# Altium PCB PCB1.PcbDoc
Units mil, origin at the board's own origin, x right, y up, seen from the top; angles counter-clockwise.
Board outline 6000 x 4000 mil, 2 copper layers (Top Layer, Bottom Layer); 11 components, 8 nets, 32 pads, 0 vias.
Unrouted connection lines stored in the file: 18.
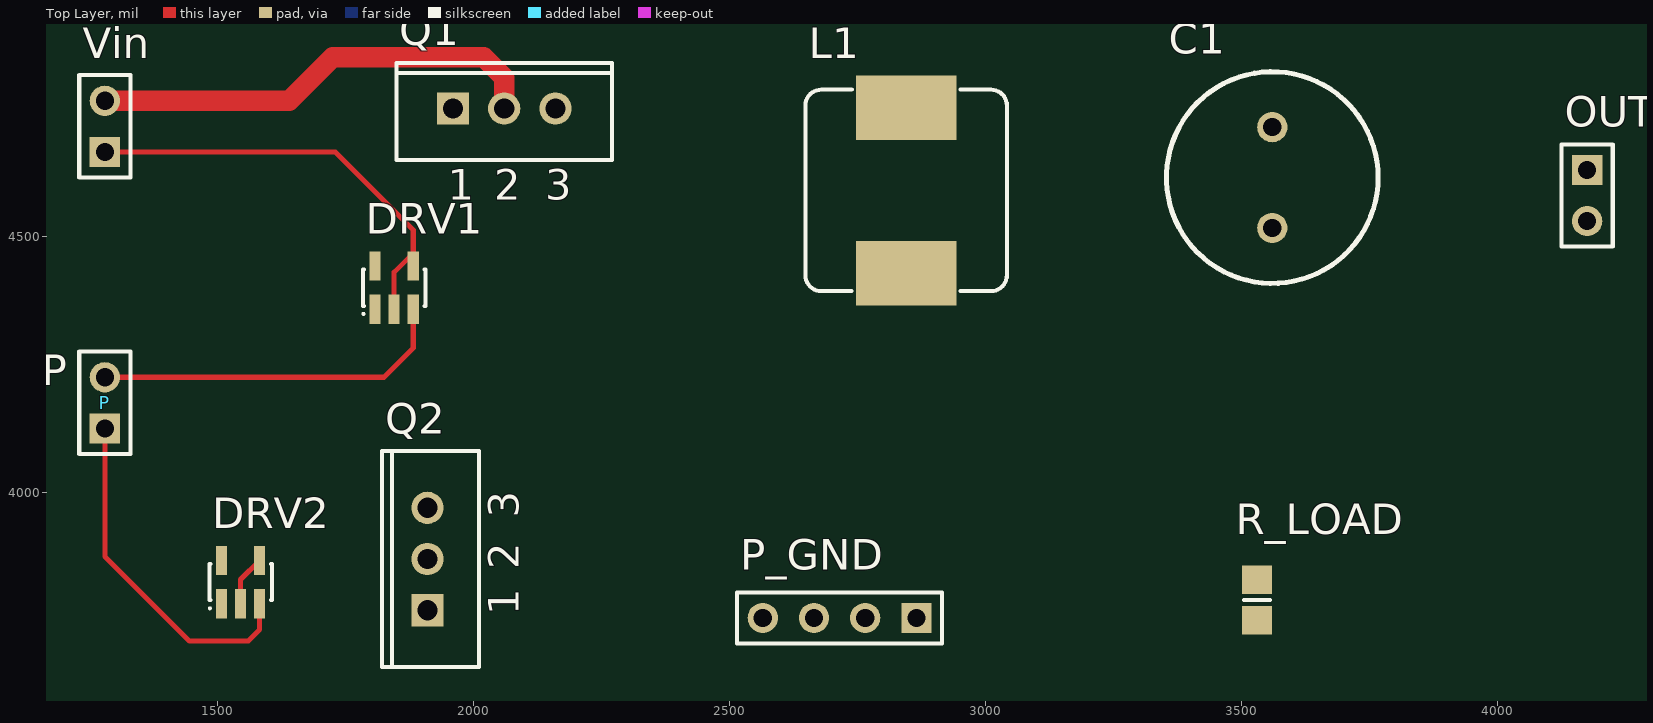
[diagram p0: Top Layer view]
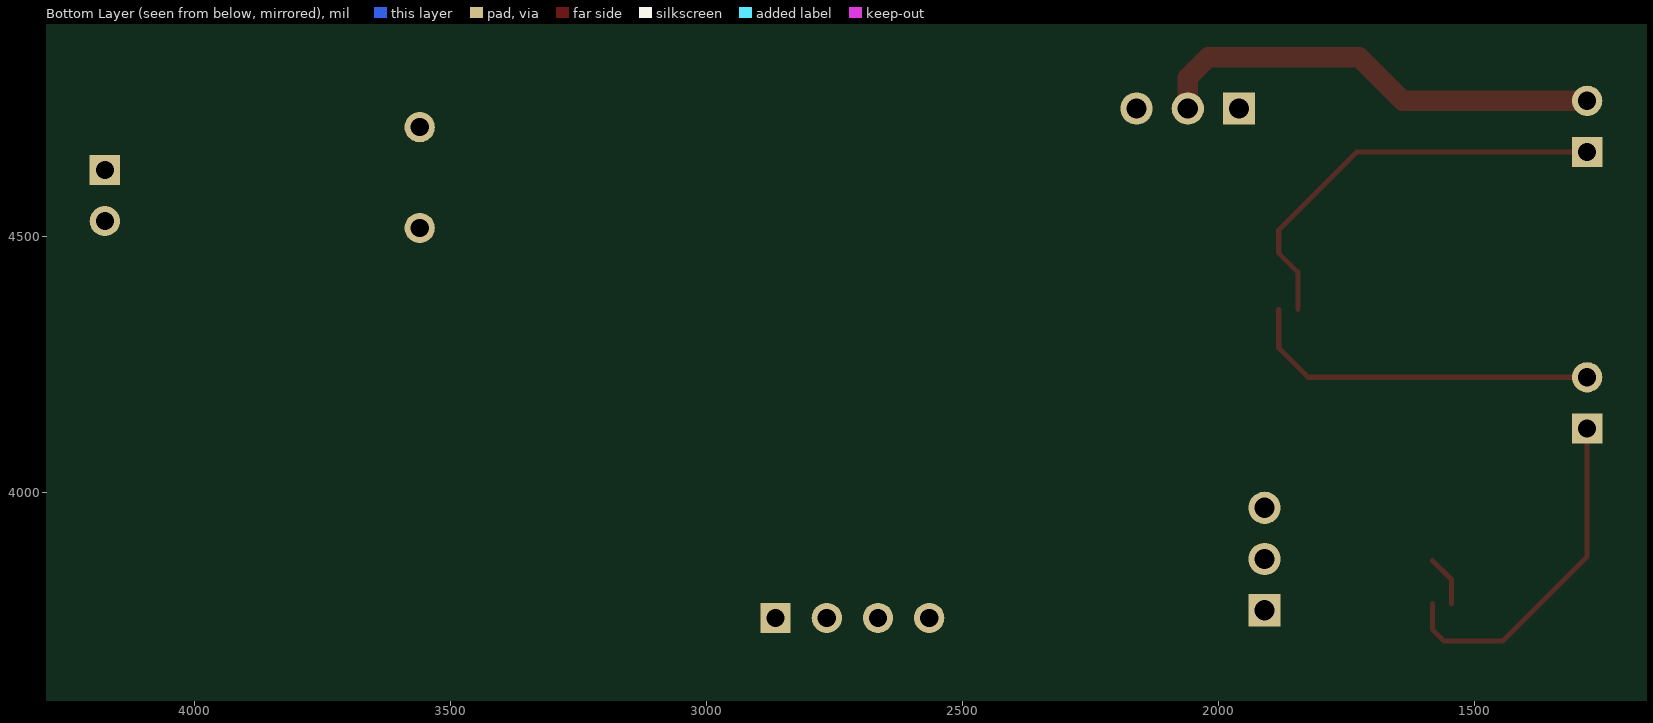
[diagram p1: Bottom Layer view, seen from below]

## Layer stack, top to bottom
Top Solder: solder mask 0.4, Solder Resist, Dk 3.5
Top Layer: signal copper 1.4
Dielectric 1: dielectric 12.6, FR-4, Dk 4.8
Bottom Layer: signal copper 1.4
Bottom Solder: solder mask 0.4, Solder Resist, Dk 3.5

## Board outline
1000,1000 7000,1000 7000,5000 1000,5000

## Design rules (kind name [scope] priority, off if disabled: settings)
Clearance [All] p1: gap=10
PolygonConnect [All] p1: connectstyle=Relief reliefconductorwidth=10 reliefentries=4 polygonreliefangle="90 Angle" airgapwidth=10
RoomDefinition Sheet1 [InComponentClass('Sheet1')] p1: confinementstyle=ConfineIn formatcopy=TRUE lockcomponents=FALSE outline 0,0 2000,0 2000,1000 0,1000
RoutingVias [All] p1: holewidth=28 width=50 viastyle="Through Hole" minholewidth=28 minwidth=50 maxholewidth=28 maxwidth=50
SolderMaskExpansion [All] p1: expansion=4
Width [All] p1: maxlimit=40 minlimit=10 preferedwidth=10
30 further rules are at their usual default settings.

## Components (designator, comment, footprint, x,y, rotation, side; value= is the part's Value field where it differs from the comment)
C1 "Cap" RB5-10.5 3560,4615 r90 top
DRV1 "Gate Driver" SO-G5/P.95 1845,4400 r0 top
DRV2 "Gate Driver" SO-G5/P.95 1545,3825 r0 top
L1 "Inductor" "WE-PD HV_1060" 2845,4590 r0 top
OUT "Header 2" HDR1X2 4175,4630 r270 top
P "Header 2" HDR1X2 1280,4125 r90 top
P_GND "Header 4" HDR1X4 2865,3755 r180 top
Q1 "MOSFET-N" TO-220-AB 2060,4750 r0 top
Q2 "MOSFET-N" TO-220-AB 1910,3870 r90 top
R_LOAD "Res1" 6-0805_M 3530,3790 r90 top
Vin "Header 2" HDR1X2 1280,4665 r90 top

## Footprints (in the part's own frame and the unit in brackets; to place one, negate y for a bottom-side part, rotate by r counter-clockwise, add the part's x,y. Pads: shape width x height; smd on the part's side, far side on the other; paste and mask are expansions set on the pad)
6-0805_M [mm] "Chip Resistor, Body 2.0x1.2mm, IPC Low Density"
  rect 1.4x1.5 smd: 1(-1,0) 2(1,0)
  silkscreen extent 0,-0.65 0,0.65, body extent -1.07,-0.7 1.07,0.7, height 0.7
HDR1X2 [mm] "Connector; Header; 2 Position"
  rect 1.5x1.5 hole 0.9: 1(0,0)
  round 1.5 hole 0.9: 2(2.54,0)
  silkscreen extent -1.27,-1.27 3.81,1.27
HDR1X4 [mm] "Connector; Header; 4 Position"
  rect 1.5x1.5 hole 0.9: 1(0,0)
  round 1.5 hole 0.9: 2(2.54,0) 3(5.08,0) 4(7.62,0)
  silkscreen extent -1.27,-1.27 8.89,1.27
RB5-10.5 [mm] "Capacitor (Radial); 2 Leads"
  round 1.5 hole 0.9: 1(-2.5,0) 2(2.5,0)
  silkscreen extent -5.25,-5.25 5.25,5.25
SO-G5/P.95 [mm] "SOT-23/SC-74A; 5 Leads; Body 3.1 x 3 mm, inc. leads (LxW max)"
  rect 0.55x1.45 smd: 1(-0.95,-1.075) 2(0,-1.075) 3(0.95,-1.075) 4(0.95,1.075) 5(-0.95,1.075)
  silkscreen extent -1.57,-1.35 1.55,0.9
TO-220-AB [mm] "TO, Thru-Hole, Vertical, Heatsink Mounted; 3 In-Line Leads; Pitch 2.54 mm"
  rect 1.6x1.6 hole 1: 1(-2.54,0)
  round 1.6 hole 1: 2(0,0) 3(2.54,0)
  silkscreen extent -5.35,-2.55 5.35,2.25
"WE-PD HV_1060" [mm] "SMD Power Inductor, body 10x10"
  rect 5x3.2 smd: 1(0,4.1) 2(0,-4.1)
  silkscreen extent -5,-5 5,5, body extent -5,-5 5,5, height 5.7

## Part data
C1: "Capacitor"
DRV1 DRV2: library part Component_1
OUT P Vin: "Header, 2-Pin"
P_GND: "Header, 4-Pin"
Q1 Q2: "N-Channel MOSFET"
R_LOAD: "Resistor"

## Nets (pads, with @x,y where several pads share a name; then routed paths per layer and width w, separated by ;. In a path a pad name is that pad's centre, name@x,y a point inside that pad or via, vN(x,y) a via of type N, cw(c..) or ccw(c..) an arc to the next point about the centre after c; other vN are vias at no path point)
GND: C1.1 DRV1.2 DRV1.4 DRV2.2 DRV2.4 OUT.2 P_GND.1 P_GND.2 P_GND.3 P_GND.4 Q2.3 R_LOAD.1 Vin.1 | length 936.1
  Top Layer w10: Vin.1 1730,4665 1882.4,4512.6 1882.4,4467.4 1845,4430 DRV1.2 ; DRV2.2 1545,3829.92 DRV2.4
NetC1_2: C1.2 L1.2 OUT.1 R_LOAD.2
NetDRV1_3: DRV1.3 P.2 | length 701.5
  Top Layer w10: P.2 1825,4225 1882.4,4282.4 DRV1.3
NetDRV1_5: DRV1.5 Q1.1
NetDRV2_3: DRV2.3 P.1 | length 680.3
  Top Layer w10: P.1 1280,3875 1445,3710 1560,3710 1582.4,3732.4 DRV2.3
NetDRV2_5: DRV2.5 Q2.1
NetL1_1: L1.1 Q1.3 Q2.2
VIN: DRV1.1 DRV2.1 Q1.2 Vin.2 | length 891.8
  Top Layer w40: Vin.2 1640,4765 1725,4850 2020,4850 2060,4810 Q1.2

## Text inside footprints (layer, text, board x,y; h text height)
Q1: Top Overlay "1" at 1950.16,4571.85 h59.06; Top Overlay "2" at 2040.32,4571.85 h59.06; Top Overlay "3" at 2140.32,4571.85 h59.06
Q2: Top Overlay "1" at 2088.15,3760.16 h59.06 r90; Top Overlay "2" at 2088.15,3850.32 h59.06 r90; Top Overlay "3" at 2088.15,3950.32 h59.06 r90